# Altium PCB MB1367.PcbDoc (part 4 of 6)
Units mm, origin at the board's own origin, x right, y up, seen from the top; angles counter-clockwise.
Board outline 70 x 82.5 mm, 4 copper layers (Top Layer, Signal Layer 1, Signal Layer 2, Bottom Layer), stack 1.614 mm thick; 187 components, 143 nets, 802 pads, 920 vias.
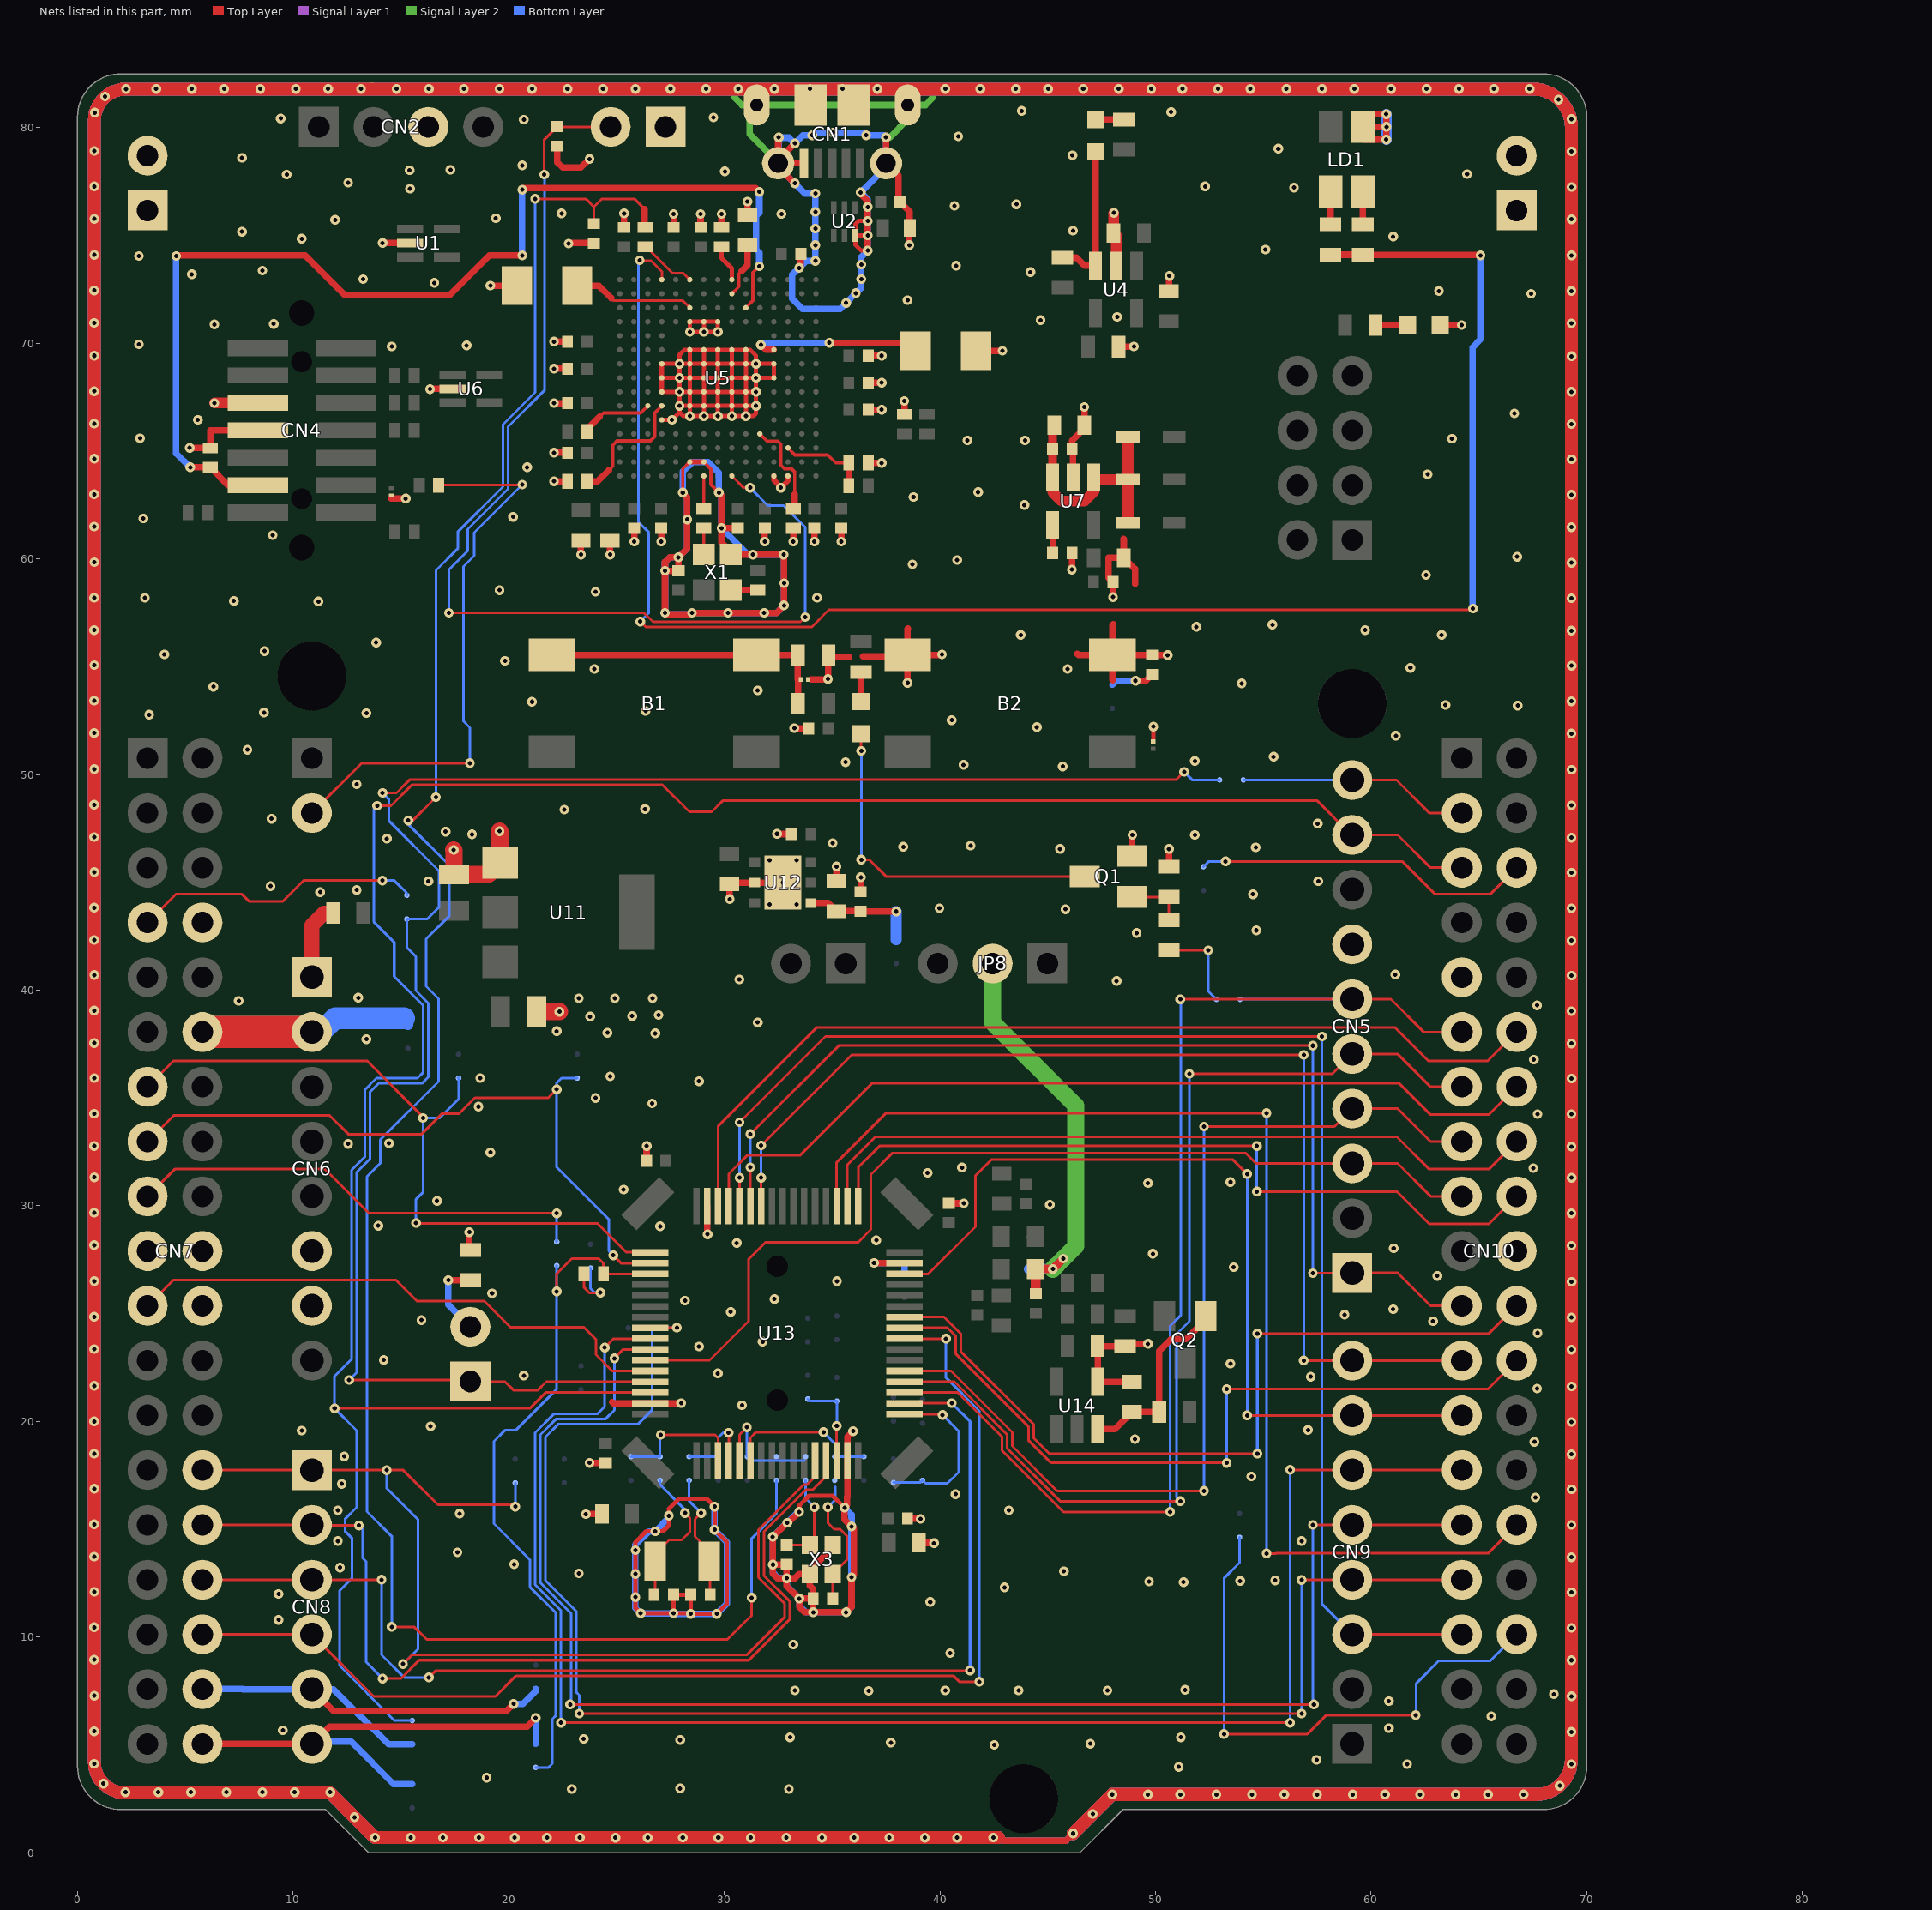
[diagram p5: the nets of this part, all layers, seen from the top]

## Via types
v1: diameter 0.45, hole 0.2, Top Layer to Bottom Layer, tented both sides, 920 vias

## Nets (pads, with @x,y where several pads share a name; then routed paths per layer and width w, separated by ;. In a path a pad name is that pad's centre, name@x,y a point inside that pad or via, vN(x,y) a via of type N, cw(c..) or ccw(c..) an arc to the next point about the centre after c; other vN are vias at no path point) (continued)
GND: B2.3 B2.4 C1.1 C2.1 C3.1 C4.1 C5.1 C6.1 C7.1 C8.1 C9.1 C10.1 C11.1 C12.1 C13.1 C14.1 C15.1 C16.1 C17.1 C18.1 C19.1 C20.1 C21.1 C22.1 C23.1 C24.1 C25.1 C26.1 C27.1 C28.1 C29.1 C30.1 C31.1 C32.1 C33.1 C34.1 C35.1 C36.1 C37.1 C38.1 C39.1 C40.1 C41.1 C42.1 C45.1 C52.1 C53.1 C54.1 C55.1 C56.1 C57.2 C58.2 C59.1 CN1.5 CN1.6 CN1.7 CN1.8 CN1.9 CN1.10 CN1.11 CN2.3 CN4.5 CN4.7 CN5.7 CN6.6 CN6.7 CN7.8 CN7.19 CN7.20 CN7.22 CN10.9 CN10.20 CN11.1 CN11.2 CN12.1 CN12.2 JP1.1 LD1.1 LD3.2 Q1.2 R5.1 R8.2 R11.1 R15.1 R16.2 R17.1 R21.1 R26.1 R28.1 R31.1 SB11.1 U1.2 U2.3 U3.2 U4.2 U5.D5 U5.D7 U5.D8 U5.D9 U5.F2 U5.F6 U5.F7 U5.F8 U5.F9 U5.F10 U5.F12 U5.G2 U5.G6 U5.G7 U5.G8 U5.G9 U5.G10 U5.G12 U5.H6 U5.H7 U5.H8 U5.H9 U5.H10 U5.H12 U5.J6 U5.J7 U5.J8 U5.J9 U5.J10 U5.K6 U5.K7 U5.K8 U5.K9 U5.K10 U5.M1 U5.M8 U5.M9 U5.N1 U6.2 U7.2 U8.2 U9.2 U10.2 U11.1 U12.2 U12.EP U13.15 U13.31 U13.47 U13.63 X1.2 X3.2 X3.4 | length 1507.3
  Top Layer w0.15: v1(28.075,63.075) 28.075,64.175 U5.F2@28.4,64.5 ; U5.G2@29.05,64.5 29.38,64.17 29.38,63.445 v1(29.75,63.075)
  Top Layer w0.2: U5.D5@27.1,66.45 v1(27.575,66.45) 27.925,66.8 ; v1(33.475,15.8) 33.5,15.825 33.5,16.125 33.93,16.555 35.02,16.555 v1(35.575,16) ; v1(36.65,74.3) 36.35,74.3 36.075,74.575 U2.3@36.075,75 ; v1@36.65,74.975 36.625,75 U2.3@36.075,75 ; v1(36.65,75.675) 36.225,75.675 36.075,75.525 U2.3@36.075,75 ; 49.895,51.677 49.895,52.22 v1(49.9,52.225) ; U5.D8@27.1,68.4 U5.D9@27.1,69.05 v1(27.925,69.05) ; U5.D8@27.1,68.4 U5.D7@27.1,67.75 v1(27.925,67.75) ; U5.D8@27.1,68.4 v1(27.925,68.4) ; v1(27.645,11.1) 28.42,11.1 v1(28.445,11.075) ; v1(27.645,11.1) C57.2@27.645,11.965 C58.2@28.445,11.965 v1(28.445,11.075) ; v1(27.645,11.1) v1(26.125,11.1) 25.875,11.35 v1(25.875,11.85) v1(25.875,12.925) v1(25.875,14.025) 25.875,14.399 26.376,14.9 v1(26.8,14.9) 27.15,14.9 27.425,15.175 v1(27.425,15.625) 27.425,15.949 27.891,16.415 29.185,16.415 v1(29.55,16.05) v1(29.55,14.975) 30.105,14.42 30.105,11.53 v1(29.65,11.075) v1(28.445,11.075) ; 27.925,66.8 28.1,66.625 v1(28.4,66.625) ; 27.925,66.8 v1(27.925,67.1) ; v1(27.925,67.1) v1(27.925,67.75) ; v1(27.925,67.1) U5.F6@28.4,67.1 ; v1(27.925,67.75) v1(27.925,68.4) ; v1(27.925,67.75) U5.F7@28.4,67.75 ; v1(27.925,68.4) v1(27.925,69.05) ; v1(27.925,68.4) U5.F8@28.4,68.4 ; v1(27.925,69.05) 27.925,69.475 28.15,69.7 U5.F10@28.4,69.7 ; v1(27.925,69.05) U5.F9@28.4,69.05 ; v1(28.4,66.625) v1(29.05,66.625) ; v1(28.4,66.625) U5.F6@28.4,67.1 ; U5.F6@28.4,67.1 U5.F7@28.4,67.75 ; U5.F6@28.4,67.1 U5.G6@29.05,67.1 ; U5.F7@28.4,67.75 U5.G7@29.05,67.75 ; U5.F7@28.4,67.75 U5.F8@28.4,68.4 ; U5.F8@28.4,68.4 U5.G8@29.05,68.4 ; U5.F8@28.4,68.4 U5.F9@28.4,69.05 ; U5.F9@28.4,69.05 U5.G9@29.05,69.05 ; U5.F9@28.4,69.05 U5.F10@28.4,69.7 ; U5.F10@28.4,69.7 U5.G10@29.05,69.7 ; v1(29.05,66.625) v1(29.7,66.625) ; v1(29.05,66.625) U5.G6@29.05,67.1 ; U5.G6@29.05,67.1 U5.G7@29.05,67.75 ; U5.G6@29.05,67.1 U5.H6@29.7,67.1 ; U5.G7@29.05,67.75 U5.H7@29.7,67.75 ; U5.G7@29.05,67.75 U5.G8@29.05,68.4 ; U5.G8@29.05,68.4 U5.H8@29.7,68.4 ; U5.G8@29.05,68.4 U5.G9@29.05,69.05 ; U5.G9@29.05,69.05 U5.H9@29.7,69.05 ; U5.G9@29.05,69.05 U5.G10@29.05,69.7 ; U5.G10@29.05,69.7 U5.H10@29.7,69.7 ; v1(29.05,70.525) v1(28.4,70.525) U5.F12@28.4,71 U5.G12@29.05,71 ; v1(29.05,70.525) v1(29.7,70.525) U5.H12@29.7,71 U5.G12@29.05,71 ; v1(29.05,70.525) U5.G12@29.05,71 ; v1(29.7,66.625) v1(30.35,66.625) ; v1(29.7,66.625) U5.H6@29.7,67.1 ; U5.H6@29.7,67.1 U5.H7@29.7,67.75 ; U5.H6@29.7,67.1 U5.J6@30.35,67.1 ; U5.H7@29.7,67.75 U5.J7@30.35,67.75 ; U5.H7@29.7,67.75 U5.H8@29.7,68.4 ; U5.H8@29.7,68.4 U5.J8@30.35,68.4 ; U5.H8@29.7,68.4 U5.H9@29.7,69.05 ; U5.H9@29.7,69.05 U5.J9@30.35,69.05 ; U5.H9@29.7,69.05 U5.H10@29.7,69.7 ; U5.H10@29.7,69.7 U5.J10@30.35,69.7 ; v1(30.35,66.625) v1(31,66.625) ; v1(30.35,66.625) U5.J6@30.35,67.1 ; U5.J6@30.35,67.1 U5.K6@31,67.1 ; U5.J6@30.35,67.1 U5.J7@30.35,67.75 ; U5.J7@30.35,67.75 U5.K7@31,67.75 ; U5.J7@30.35,67.75 U5.J8@30.35,68.4 ; U5.J8@30.35,68.4 U5.K8@31,68.4 ; U5.J8@30.35,68.4 U5.J9@30.35,69.05 ; U5.J9@30.35,69.05 U5.K9@31,69.05 ; U5.J9@30.35,69.05 U5.J10@30.35,69.7 ; U5.J10@30.35,69.7 U5.K10@31,69.7 ; v1(31,66.625) 31.35,66.625 31.475,66.75 v1(31.475,67.1) ; v1(31,66.625) U5.K6@31,67.1 ; U5.K6@31,67.1 U5.K7@31,67.75 ; U5.K6@31,67.1 v1(31.475,67.1) ; U5.K7@31,67.75 U5.K8@31,68.4 ; U5.K7@31,67.75 v1(31.475,67.75) ; U5.K8@31,68.4 v1(31.475,68.4) ; U5.K8@31,68.4 U5.K9@31,69.05 ; U5.K9@31,69.05 v1(31.475,69.05) ; U5.K9@31,69.05 U5.K10@31,69.7 ; U5.K10@31,69.7 31.2,69.7 31.475,69.425 v1(31.475,69.05) ; v1(31.475,67.1) v1(31.475,67.75) ; v1(31.475,67.75) v1(31.475,68.4) ; v1(31.475,68.4) v1(31.475,69.05) ; v1(31.475,68.4) U5.M8@32.3,68.4 U5.M9@32.3,69.05 v1(31.475,69.05)
  Top Layer w0.25: U5.F2@28.4,64.5 U5.G2@29.05,64.5 ; U5.M1@32.3,63.85 32.3,63.65 32.625,63.325 v1(32.625,63.3) 32.95,63.625 U5.N1@32.95,63.85
  Top Layer w0.3: v1(5.2,65.15) R15.1@6.15,65.15 6.15,65.965 CN4.7@8.363,65.965 ; v1(6.35,67.225) v1@6.36,67.235 ; 13.64,81.92 13.67,81.89 ; v1(14.15,74.65) U1.2@15.425,74.65 ; 14.545,62.802 15.222,62.802 v1(15.222,62.797) ; v1(16.35,67.875) 16.365,67.89 U6.2@17.395,67.89 ; v1(18.175,28.775) 18.175,27.99 R31.1@18.22,27.945 ; v1(19.15,72.675) C10.1@20.375,72.675 ; v1(22.1,63.6) R17.1@22.725,63.6 ; v1(22.1,64.925) C21.1@22.725,64.925 ; v1(22.1,67.225) C17.1@22.725,67.225 ; v1(22.1,68.825) C15.1@22.725,68.825 ; v1(22.1,70.075) C13.1@22.725,70.075 ; C1.1@22.25,79.15 22.25,78.4 22.5,78.15 23.35,78.15 v1(23.75,78.55) ; v1(22.775,74.625) 22.8,74.65 C3.1@23.95,74.65 ; v1(23.35,60.2) C28.1@23.35,60.85 ; v1(23.575,15.7) C53.1@24.325,15.7 ; v1(23.75,18.075) 23.76,18.065 C52.1@24.495,18.065 ; v1(24.7,60.2) C29.1@24.7,60.85 ; 24.8,20.9 24.86,20.84 27.99,20.84 v1(28,20.85) ; C6.1@25.35,75.375 v1(25.35,76.025) ; v1(25.825,60.8) C22.1@25.825,61.425 ; C42.1@26.395,32.09 26.395,32.77 v1(26.4,32.775) ; v1(27.075,60.8) C23.1@27.075,61.425 ; C7.1@27.65,75.375 v1(27.65,76) ; v1(28.075,63.075) 28.28,62.87 v1(28.28,61.83) 28.28,60.48 v1(27.875,60.075) ; C8.1@28.9,75.375 v1(28.9,76) ; U13.47@29.21,29.99 29.21,28.69 v1(29.225,28.675) ; v1(29.75,63.075) 29.875,62.95 v1(29.875,61.425) ; R5.1@29.875,75.375 v1(29.875,76) ; v1(30.25,44.225) 30.245,44.23 C37.1@30.245,44.915 30.32,44.99 U12.2@31.42,44.99 v1(32.72,44.99) ; C24.1@30.55,61.35 C24.1@30.625,61.425 v1(29.875,61.425) ; C4.1@31.075,75.95 v1(31.075,76.575) ; v1(31.875,60.8) C25.1@31.875,61.425 ; v1(32.45,47.25) 32.46,47.24 C36.1@33.12,47.24 ; v1(32.525,79.55) 32.5,79.525 CN1.7@32.5,78.5 ; v1(32.775,58.875) v1@32.77,58.88 ; v1(33.2,60.8) R21.1@33.2,61.425 ; v1(33.25,52.15) 33.26,52.14 C35.1@33.92,52.14 ; v1(33.275,77.425) 32.5,78.2 CN1.7@32.5,78.35 ; v1(33.275,79.275) CN1.7@32.5,78.5 ; v1(33.475,15.8) 32.975,15.3 v1(32.925,15.3) 32.275,14.65 v1(32.25,14.65) 32.255,14.645 v1(32.255,13.36) ; v1(33.475,73.5) 33.55,73.575 C9.1@33.55,74.15 ; CN1.5@33.7,78.35 CN1.7@32.5,78.35 ; 34.033,54.415 34.79,54.415 v1(34.805,54.43) 34.82,54.43 R26.1@34.82,55.54 34.91,55.45 35.8,55.45 ; v1(34.175,60.8) C26.1@34.175,61.425 ; X3.4@35.02,14.265 35.02,14.133 33.97,13.083 X3.2@33.97,12.915 ; C39.1@35.195,45.065 35.195,45.725 v1(35.205,45.735) ; v1(35.425,60.8) C27.1@35.425,61.425 ; v1@35.875,12.775 36.005,12.905 36.005,15.02 v1(35.9,15.125) 35.575,15.45 v1(35.575,16) 35.7,16.125 35.7,16.5 35.71,16.51 35.71,19.285 v1(35.975,19.55) ; v1(35.9,12.775) 35.9,11.4 v1(35.65,11.15) v1(34.125,11.15) ; C40.1@36.32,44.565 36.32,45.225 v1(36.33,45.235) ; v1(36.325,77) 36.325,76.925 36.65,76.6 v1(36.65,76.325) v1(36.65,75.675) v1(36.65,75) 36.65,74.975 v1(36.65,74.3) ; 36.425,55.475 38.43,55.475 B2.4@38.505,55.55 ; R16.2@36.675,64.45 v1(37.3,64.45) ; C18.1@36.675,66.925 v1(37.3,66.925) ; C16.1@36.675,68.175 v1(37.3,68.175) ; C14.1@36.675,69.425 v1(37.3,69.425) ; v1(36.945,27.35) 36.935,27.34 U13.31@38.36,27.34 ; v1(37.5,79.55) CN1.6@37.5,78.35 38.08,77.77 38.08,76.62 38.1,76.6 38.6,76.1 U3.2@38.6,75.35 ; R11.1@38.35,66.7 v1(38.35,67.325) ; C54.1@38.495,15.49 39.085,15.49 v1(39.1,15.475) ; v1(38.5,54.25) 38.505,54.255 B2.4@38.505,55.55 ; 38.525,56.775 38.505,56.755 B2.4@38.505,55.55 ; v1(38.58,74.555) 38.58,74.855 ; C55.1@39.02,14.365 39.715,14.365 39.725,14.375 v1(39.725,14.35) ; v1(40.1,55.575) 40.075,55.55 B2.4@38.505,55.55 ; C45.1@40.42,30.115 v1(41.115,30.115) ; C12.1@41.675,69.65 v1(42.9,69.65) ; 42.72,0.7 42.82,0.7 42.97,0.55 45.845,0.55 v1(46.185,0.89) ; v1(46.12,59.505) 46.13,59.505 C30.1@46.13,60.275 C30.1@46.18,60.325 ; U7.2@46.18,63.775 46.18,65.025 C20.1@46.13,65.075 46.13,65.48 46.705,66.055 C19.1@46.705,66.2 46.705,67.045 v1(46.7,67.05) ; 46.375,55.6 46.425,55.55 B2.3@48.005,55.55 ; 48.025,54.375 48.005,54.395 B2.3@48.005,55.55 ; v1(48.03,58.23) C33.1@48.03,58.925 47.825,59.13 47.825,60.05 C31.1@48.53,60.05 ; 48.05,56.975 48.005,56.93 B2.3@48.005,55.55 ; C5.1@48.06,75.12 C5.1@48.175,75.005 ; v1@48.06,76.035 v1(48.075,76.05) ; R8.2@48.285,69.845 48.995,69.845 v1(49,69.85) ; 48.525,60.925 48.53,60.92 C31.1@48.53,60.05 ; Q1.2@48.925,46.225 48.925,47.175 48.9,47.2 v1(48.925,47.2) ; 49.05,58.85 49.05,59.53 C31.1@48.53,60.05 ; v1(50.565,55.54) C34.1@49.845,55.54 49.835,55.55 B2.3@48.005,55.55 ; R28.1@50.625,45.725 v1(50.625,46.55) ; C11.1@50.635,72.42 50.635,73.135 v1(50.645,73.125) ; LD1.1@59.62,80.04 v1@60.71,80.04 ; LD1.1@59.65,79.45 v1(60.71,79.45) v1@60.71,80.04 ; LD1.1@59.65,80.625 v1(60.71,80.625) v1@60.71,80.04 ; v1(60.715,80.04) v1@60.71,80.04 ; LD3.2@63.2,70.85 v1(64.2,70.85) ; v1(27.25,59.45) C32.1@27.875,59.45 v1(27.875,60.075) ; v1(27.25,59.45) 27.25,59.85 27.475,60.075 v1(27.875,60.075) ; v1(27.25,59.45) 27.25,57.504 v1(27.251,57.503) 27.324,57.43 28.405,57.43 28.475,57.5 v1(28.5,57.5) v1(30.175,57.5) v1(31.85,57.5) 32.425,57.5 v1(32.77,57.845) v1@32.77,58.88 ; v1(29.875,61.425) 29.875,60.775 30.3,60.35 X1.2@30.3,60.2 v1(31.325,60.2) v1(32.75,60.2) 32.77,60.18 v1@32.77,58.88 ; v1(32.255,13.36) 32.255,12.945 32.475,12.725 v1@32.895,12.725 ; v1(32.255,13.36) 32.26,13.365 C56.1@32.895,13.365 v1@32.895,12.73 ; CN1.7@32.5,78.35 CN1.7@32.5,78.5 ; v1@32.895,12.725 v1@32.895,12.73 ; v1@32.895,12.725 32.895,12.37 v1(33.48,11.785) ; v1@32.895,12.725 v1(32.9,12.725) ; v1@32.895,12.73 v1(32.9,12.725) ; v1(32.9,12.725) 33.275,12.725 33.465,12.915 X3.2@33.97,12.915 ; v1(33.48,11.785) 33.48,11.395 33.725,11.15 v1(34.125,11.15) ; v1(33.48,11.785) 33.485,11.79 C59.1@34.12,11.79 ; X3.2@33.97,12.915 33.97,12.38 34.1,12.25 34.1,11.81 C59.1@34.12,11.79 ; C59.1@34.12,11.79 34.12,11.155 v1(34.125,11.15)
  Top Layer w0.5: v1@6.36,67.235 CN4.5@8.363,67.235 ; C5.1@48.06,75.12 v1@48.06,76.035 ; U4.2@48.175,73.595 C5.1@48.175,75.005
  Top Layer w0.6: 42.72,0.7 13.79,0.7 v1(12.85,1.64) 11.713,2.777 2.22,2.777 cw(c2.22,4.22) 0.777,4.22 v1(0.777,78.925) 0.777,80.315 cw(c2.252,80.315) v1(2.252,81.79) 13.67,81.79 67.502,81.79 cw(c67.502,79.997) 69.295,79.997 69.295,4.34 cw(c67.655,4.34) 67.655,2.7 47.995,2.7 v1(47.09,1.795) v1(46.185,0.89)
  Top Layer w0.8: v1(17.45,46.5) 17.47,46.48 C38.1@17.47,45.365 19.045,45.365 U11.1@19.595,45.915 19.595,47.355 v1(19.575,47.375) ; C41.1@21.295,39.015 22.335,39.015 v1(22.35,39)
  Signal Layer 1 w0.3: 13.64,81.92 13.67,81.89 ; 42.72,0.7 42.82,0.7 42.97,0.55 45.845,0.55 v1(46.185,0.89)
  Signal Layer 1 w0.6: 13.67,81.8 13.67,81.79 ; 42.72,0.7 13.79,0.7 v1(12.85,1.64) 11.713,2.777 2.22,2.777 cw(c2.22,4.22) 0.777,4.22 v1(0.777,78.925) 0.777,80.315 cw(c2.252,80.315) v1(2.252,81.79) 13.67,81.79 ; v1(46.185,0.89) v1(47.09,1.795) 47.995,2.7 67.655,2.7 ccw(c67.655,4.34) 69.295,4.34 69.295,79.997 ccw(c67.502,79.997) 67.502,81.79 13.67,81.79
  Signal Layer 2 w0.3: v1(27.251,57.503) v1(27.251,57.503) ; v1(28.5,57.5) v1(30.175,57.5) ; v1@30.475,81.79 30.475,81.4 30.825,81.05 CN1.8@31.5,81.05 ; CN1.7@32.5,78.35 32.5,78.375 31.175,79.7 31.175,80.725 CN1.8@31.5,81.05 ; v1(37.5,79.55) 37.675,79.55 38.5,80.375 CN1.9@38.5,81.05 ; 39.65,81.79 39.65,81.375 39.325,81.05 CN1.9@38.5,81.05 ; 42.72,0.7 42.82,0.7 42.97,0.55 45.845,0.55 v1(46.185,0.89) ; CN1.8@31.5,81.05 CN1.9@38.5,81.05
  Signal Layer 2 w0.6: 42.72,0.7 13.79,0.7 v1(12.85,1.64) 11.713,2.777 2.22,2.777 cw(c2.22,4.22) 0.777,4.22 v1(0.777,78.925) 0.777,80.315 cw(c2.252,80.315) v1(2.252,81.79) 13.67,81.79 30.475,81.79 39.65,81.79 67.502,81.79 cw(c67.502,79.997) 69.295,79.997 69.295,4.34 cw(c67.655,4.34) 67.655,2.7 47.995,2.7 v1(47.09,1.795) v1(46.185,0.89)
  Bottom Layer w0.3: 13.64,81.92 13.67,81.89 ; v1(27.425,15.625) 27.425,15.525 v1(26.8,14.9) 26.5,14.9 25.875,14.275 v1(25.875,14.025) v1(25.875,12.925) v1(25.875,11.85) 25.875,11.35 v1(26.125,11.1) v1(27.645,11.1) 27.67,11.075 v1(28.445,11.075) v1(29.65,11.075) 30.125,11.55 30.125,14.4 v1(29.55,14.975) v1(29.55,16.05) ; v1@28.05,63.075 28.28,62.845 v1(28.28,61.83) 28.28,60.48 v1(27.875,60.075) 27.475,60.075 27.25,59.85 v1(27.25,59.45) 27.251,59.449 v1(27.251,57.503) 27.324,57.43 28.43,57.43 v1(28.5,57.5) v1(30.175,57.5) v1(31.85,57.5) 32.425,57.5 v1(32.77,57.845) 32.775,57.85 v1(32.775,58.875) 32.775,60.175 v1(32.75,60.2) v1(31.325,60.2) 31.1,60.2 v1(29.875,61.425) 29.875,62.95 v1(29.75,63.075) 29.75,64 29.25,64.5 28.525,64.5 28.075,64.05 v1(28.075,63.075) ; v1@32.513,79.538 v1@32.525,79.538 ; v1(32.525,79.55) v1@32.525,79.538 ; v1(33.475,15.8) 33.425,15.8 v1(32.925,15.3) 32.9,15.3 v1(32.25,14.65) 32.255,14.645 v1(32.255,13.36) 32.255,12.995 32.5,12.75 32.875,12.75 v1(32.9,12.725) 32.9,12.365 v1(33.48,11.785) 33.48,11.445 33.775,11.15 v1(34.125,11.15) v1(35.65,11.15) 35.9,11.4 v1(35.9,12.775) v1(35.9,15.125) 35.9,15.675 v1(35.575,16) ; v1(36.945,27.35) 38.25,27.35 38.36,27.24 SB11.1@38.36,26.84 ; 42.72,0.7 42.82,0.7 42.97,0.55 45.845,0.55 v1(46.185,0.89) ; v1@32.525,79.538 33.012,79.538 v1(33.275,79.275) 33.65,79.65 v1(34.075,79.65) 34.2,79.775 v1(35.025,79.775) 36.45,79.775 v1(36.575,79.65) 37.4,79.65 v1(37.5,79.55) CN1.6@37.5,78.35 37.5,78.175 v1(36.325,77) 36.65,76.675 v1(36.65,76.325) v1(36.65,75.675) v1(36.65,75) v1(36.65,74.3) 36.35,74 v1(36.35,73.65) v1(36.35,72.975) 36.35,72.575 v1(36.1,72.325) v1(35.65,71.875) 35.375,71.6 33.625,71.6 33.15,72.075 33.15,73.175 v1(33.475,73.5) 33.8,73.825 v1(34.225,73.825) v1(34.225,74.55) v1(34.225,75.325) v1(34.225,76.1) v1(34.225,76.95) 33.75,76.95 v1(33.275,77.425) 32.5,78.2 CN1.7@32.5,78.35 32.525,78.375 v1@32.525,79.538
  Bottom Layer w0.5: v1(60.71,79.45) v1(60.71,80.625)
  Bottom Layer w0.6: 42.72,0.7 13.79,0.7 v1(12.85,1.64) 11.713,2.777 2.22,2.777 cw(c2.22,4.22) 0.777,4.22 v1(0.777,78.925) 0.777,80.315 cw(c2.252,80.315) v1(2.252,81.79) 13.67,81.79 67.502,81.79 cw(c67.502,79.997) 69.295,79.997 69.295,4.34 cw(c67.655,4.34) 67.655,2.7 47.995,2.7 v1(47.09,1.795) v1(46.185,0.89)
  other v1: 13.8,0.7 15.45,0.698 16.95,0.698 18.625,0.698 20.275,0.696 21.775,0.696 23.3,0.698 24.95,0.696 26.45,0.696 28.075,0.698 29.725,0.696 31.225,0.696 32.875,0.698 34.525,0.696 36.025,0.696 37.65,0.698 39.3,0.696 40.8,0.696 42.475,0.698 48,2.7 49.65,2.698 51.15,2.698 52.825,2.698 54.475,2.696 55.975,2.696 57.5,2.698 59.15,2.696 60.65,2.696 62.275,2.698 63.925,2.696 65.425,2.696 67.075,2.698 2.225,2.802 3.75,2.804 5.25,2.804 6.9,2.802 8.575,2.802 10.075,2.802 11.725,2.8 22.925,2.95 33,2.95 27.95,2.975 68.75,3.1 1.2,3.2 18.975,3.475 51.075,3.975 61.675,4.1 69.296,4.1 0.773,4.125 57.475,4.3 42.525,5 46.975,5.05 37.725,5.1 27.95,5.225 23.475,5.275 33.05,5.35 51.175,5.35 69.296,5.6 0.773,5.625 9.525,5.675 60.825,5.775 65.575,6.325 60.825,7.025 69.298,7.25 0.775,7.275 68.475,7.35 36.7,7.5 33.275,7.525 40.25,7.525 43.65,7.525 47.775,7.525 51.375,7.55 69.296,8.925 0.773,8.95 40.475,9.25 33.2,9.65 69.296,10.425 0.773,10.45 9.325,10.8 39.55,11.625 9.325,12 69.298,12.075 0.775,12.1 43,12.3 51.3,12.55 49.7,12.575 53.925,12.6 55.55,12.625 23.25,12.95 45.75,13.05 12.175,13.225 20.25,13.375 69.296,13.7 0.773,13.725 17.625,13.925 12.075,14.45 56.775,14.45 69.296,15.2 0.773,15.225 17.725,15.725 12.075,15.875 43.2,15.875 67.625,16.475 40.725,16.625 69.298,16.85 0.775,16.875 12.25,17.1 54.45,17.45 12.375,18.375 69.296,18.475 0.773,18.5 67.575,19.05 49.05,19.175 10.4,19.575 57.075,19.6 16.375,19.775 69.296,19.975 0.773,20 30.825,20.75 67.7,21.525 69.298,21.625 0.775,21.65 57.2,22.075 20.7,22.125 29.7,22.225 53.475,22.675 14.2,22.85 69.296,23.325 0.773,23.35 28.825,23.475 31.775,23.7 67.725,24.1 62.875,24.65 15.95,24.7 69.296,24.825 0.773,24.85 58.775,24.95 30.3,25.075 61.025,25.2 28.175,25.6 32.325,25.675 19.225,25.94 69.298,26.475 0.775,26.5 35.225,26.5 63.075,26.75 53.625,27.15 49.875,27.775 61.05,28.025 69.296,28.15 0.773,28.175 30.575,28.275 37.05,28.4 27.025,29.05 13.95,29.075 69.296,29.65 0.773,29.675 45.1,30.05 16.675,30.225 25.325,30.75 49.65,31.05 53.475,31.1 69.298,31.3 0.775,31.325 39.425,31.525 67.525,31.75 41.025,31.775 19.15,32.475 69.296,32.75 0.773,32.775 12.55,32.875 14.45,32.9 67.725,34.25 69.296,34.25 0.773,34.275 18.6,34.6 26.65,34.75 24.025,35 28.825,35.775 69.298,35.9 0.775,35.925 18.675,35.925 24.7,36 67.55,36.775 69.296,37.525 0.773,37.55 13.4,37.725 26.8,38 24.575,38.025 22.225,38.1 31.55,38.5 23.775,38.775 25.725,38.8 26.95,38.85 69.296,39.025 0.773,39.05 67.7,39.3 7.475,39.5 23.25,39.625 24.925,39.625 26.675,39.625 13.025,39.65 48.2,40.425 30.7,40.5 69.298,40.675 0.775,40.7 61.125,40.725 69.296,42.3 0.773,42.325 49.125,42.65 54.675,42.775 45.825,43.75 39.975,43.8 69.296,43.8 0.773,43.825 32.1,43.975 33.35,43.975 54.525,44.45 11.25,44.55 12.95,44.65 8.95,44.825 16.275,45.05 57.55,45.05 69.298,45.45 0.775,45.475 32.1,46.025 33.35,46.025 45.575,46.55 54.65,46.625 38.3,46.65 41.425,46.7 35.025,46.825 14.35,47.025 69.296,47.075 0.773,47.1 51.825,47.2 18.3,47.225 17.075,47.35 57.525,47.725 9,47.95 22.575,48.375 26.325,48.4 69.296,48.575 0.773,48.6 12.95,49.55 69.298,50.225 0.775,50.25 45.7,50.375 41.1,50.45 35.625,50.575 51.825,50.625 55.475,50.825 7.875,51.15 61.15,51.8 69.296,51.9 0.773,51.925 44.5,52.2 40.55,52.525 3.325,52.775 13.4,52.85 8.65,52.875 26.35,52.95 66.8,53.2 63.45,53.225 21.075,53.375 69.296,53.4 0.773,53.425 31.55,53.9 6.3,54.075 54,54.225 23.975,54.9 45.925,54.9 61.825,54.95 69.298,55.05 0.775,55.075 19.825,55.275 4.025,55.575 8.675,55.725 13.85,56.125 43.75,56.475 63.275,56.475 69.296,56.675 0.773,56.7 59.725,56.7 51.9,56.85 55.425,56.95 11.175,58.025 7.25,58.05 69.296,58.175 0.773,58.2 3.125,58.2 34.3,58.2 24.025,58.475 19.575,58.55 62.55,59.25 38.725,59.75 69.298,59.825 0.775,59.85 40.8,59.95 66.775,60.1 9.05,61.1 69.296,61.475 0.773,61.5 3.05,61.875 20.2,61.95 43.925,62.5 38.775,62.875 69.296,62.975 0.773,63 41.775,63.1 62.625,63.925 20.85,64.25 69.298,64.625 0.775,64.65 41.275,65.5 43.95,65.5 63.75,65.575 2.9,65.6 69.296,66.25 0.773,66.275 5.575,66.45 66.65,66.75 69.296,67.75 0.773,67.775 69.298,69.4 0.775,69.425 14.575,69.85 18.05,69.9 2.85,69.95 6.35,70.875 9.1,70.9 69.296,70.925 0.773,70.95 44.675,71.075 48.225,71.225 38.5,72 67.425,72.3 63.15,72.425 69.296,72.425 0.773,72.45 16.55,72.8 13.25,72.975 5.3,73.2 44.2,73.3 8.575,73.375 40.75,73.6 2.85,74.05 69.298,74.075 0.775,74.1 55.1,74.35 10.4,74.85 61.025,74.95 7.625,75.175 46.175,75.225 11.95,75.725 69.298,75.75 0.775,75.775 19.4,75.8 32.65,76 22.45,76.025 40.675,76.375 43.55,76.45 15.425,77.175 56.425,77.225 69.298,77.25 0.775,77.275 52.3,77.275 12.55,77.45 9.7,77.825 64.45,77.85 30.025,77.975 15.4,78.025 17.3,78.05 20.625,78.25 7.625,78.6 46.15,78.725 69.3,78.9 55.7,79.025 40.85,79.6 20.7,80.375 69.3,80.4 9.425,80.425 29.5,80.475 0.8,80.7 50.725,80.725 43.8,80.775 68.7,81.3 1.275,81.45 3.65,81.8 5.3,81.798 6.8,81.798 8.475,81.798 10.125,81.796 11.625,81.796 13.15,81.798 14.8,81.796 16.3,81.796 17.925,81.798 19.575,81.796 21.075,81.796 22.725,81.798 24.375,81.796 25.875,81.796 27.5,81.798 29.15,81.796 30.65,81.796 32.325,81.798 33.975,81.796 35.475,81.796 37.1,81.798 40.25,81.796 41.875,81.798 43.525,81.796 45.025,81.796 46.65,81.798 48.3,81.796 49.8,81.796 51.25,81.798 52.9,81.796 54.4,81.796 56.075,81.798 57.725,81.796 59.225,81.796 60.925,81.798 62.575,81.796 64.075,81.796 65.7,81.798 67.35,81.796
GNDDetect: CN4.11 R15.2 U5.K13 | length 51
  Top Layer w0.15: U5.K13@31,71.65 31.33,71.98 31.33,73.28 v1(31.625,73.575)
  Top Layer w0.3: v1(4.575,74.05) 4.6,74.075 10.55,74.075 12.375,72.25 17.275,72.25 19.1,74.075 v1(20.625,74.075) ; v1(5.225,64.25) R15.2@6.15,64.25 6.975,63.425 CN4.11@8.363,63.425 ; v1(20.625,77.125) 20.695,77.195 31.455,77.195 v1(31.625,77.025)
  Bottom Layer w0.3: v1(4.575,74.05) 4.575,64.9 v1(5.225,64.25) ; v1(20.625,74.075) v1(20.625,77.125) ; v1(31.625,73.575) 31.625,74.2 31.475,74.35 31.475,75.9 31.625,76.05 v1(31.625,77.025)
IOREF: CN6.2 CN7.12 SB39.2 | length 20.2
  Top Layer w1.5: CN7.12@5.79,38.06 CN6.2@10.87,38.06
  Signal Layer 2 w1.5: CN7.12@5.79,38.06 CN6.2@10.87,38.06
  Bottom Layer w0.5: 15.15,38.7 15.325,38.525 SB39.2@15.325,38.4
  Bottom Layer w1: CN6.2@10.87,38.06 11.31,38.06 11.95,38.7 15.15,38.7
  Bottom Layer w1.5: CN7.12@5.79,38.06 CN6.2@10.87,38.06
LED_STLK: R2.2 R3.2 U5.D15 | length 83
  Top Layer w0.12: v1@26.075,73.825 26.617,73.825 27.105,73.337 27.105,72.955 U5.D15@27.1,72.95 ; v1(26.1,57.1) 26.115,57.1 26.375,56.84 34.051,56.84 34.851,57.64 64.665,57.64 v1(64.725,57.7) ; R2.2@58.12,74.115 R2.2@58.135,74.1 ; v1(65.075,74.075) 65.075,74.1 65.075,74.125 v1@65.1,74.1
  Top Layer w0.3: R2.2@58.12,74.115 R3.2@59.62,74.115 ; R2.2@58.135,74.1 65.075,74.1 v1@65.1,74.1
  Bottom Layer w0.12: v1(26.075,73.85) 26.02,73.795 26.02,61.707 26.5,61.227 26.5,57.5 v1(26.1,57.1) ; v1@64.7,57.725 v1(64.725,57.7)
  Bottom Layer w0.3: v1@64.7,57.725 64.7,69.8 65.075,70.175 v1(65.075,74.075)
MCO: C3.2 R4.2 SB27.1 | length 103.5
  Top Layer w0.12: v1(14.575,10.475) 15.607,10.475 16.197,9.885 30.146,9.885 31.001,10.741 31.009,10.741 31.275,11.007 v1(31.275,11.825) ; v1(15.346,47.868) 15.543,47.868 v1(16.625,48.95) ; v1(21.225,76.7) 23.575,76.7 23.95,76.325 ; C3.2@23.95,75.55 23.95,76.325 ; 26.3,76.225 25.825,76.7 24.325,76.7 23.95,76.325
  Top Layer w0.3: 26.3,76.225 26.3,75.4 R4.2@26.325,75.375
  Bottom Layer w0.12: v1(14.575,10.475) 14.575,14.675 13.43,15.82 13.43,31.355 14.045,31.97 14.045,33.068 16.745,35.768 16.745,39.6 16.17,40.175 16.17,42.376 17.25,43.456 17.25,45.788 15.346,47.692 v1(15.346,47.868) ; v1(16.625,48.95) 16.625,59.475 17.65,60.5 17.65,61.271 19.73,63.351 19.73,66.23 21.225,67.725 v1(21.225,76.7) ; v1(31.275,11.825) 31.275,14.575 32.42,15.72 SB27.1@32.42,17.265
NetB1_3: B1.3 B1.4 R26.2 R27.1 U9.1 | length 13.7
  Top Layer w0.3: B1.4@21.995,55.55 B1.3@31.495,55.55 33.41,55.55 33.408,55.548 33.408,54.415 33.42,54.402 R27.1@33.42,53.29
NetC1_2: C1.2 JP1.2 U5.J1 | length 52.5
  Top Layer w0.12: v1(17.225,57.5) 17.23,57.505 26.268,57.505 26.693,57.08 33.53,57.08 v1(33.75,57.3) ; v1(21.65,77.825) 21.65,79.45 C1.2@22.25,80.05 ; C1.2@22.25,80.075 22.285,80.04 JP1.2@24.73,80.04 ; U5.J1@30.35,63.85 30.9,63.3 v1(31.2,63.3)
  Bottom Layer w0.12: v1(17.225,57.5) 17.225,59.5 18.1,60.375 18.1,61.382 19.97,63.252 19.97,66.131 21.67,67.831 21.67,77.805 v1(21.65,77.825) ; v1(31.2,63.3) 32.025,62.475 32.75,62.475 33.75,61.475 v1(33.75,57.3)
NetC4_2: C4.2 U5.J14 | length 2.6
  Top Layer w0.15: U5.J14@30.35,72.3 30.68,72.63 30.68,73.23 30.8,73.35
  Top Layer w0.3: 30.8,73.35 31.075,73.625 C4.2@31.075,74.55
NetC10_2: C10.2 U5.F13 | length 5.6
  Top Layer w0.12: 24.75,72.1 24.875,71.975 28.075,71.975 U5.F13@28.4,71.65
  Top Layer w0.3: C10.2@23.175,72.675 24.175,72.675 24.75,72.1
NetC12_2: C12.2 U5.M10 | length 8.1
  Top Layer w0.3: v1(31.7,69.925) 31.925,69.7 U5.M10@32.295,69.7 ; v1(34.875,70.025) 38.5,70.025 C12.2@38.875,69.65
  Bottom Layer w0.3: v1(31.7,69.925) 31.8,70.025 v1(34.875,70.025)
NetC19_2: C19.2 C20.2 D1.2 D2.2 D3.2 U7.1 U7.3 | length 11.7
  Top Layer w0.3: C19.2@45.23,66.125 C19.2@45.305,66.2 ; U7.1@47.13,63.775 47.15,63.755 U7.1@47.23,63.675
  Top Layer w0.4: U7.3@45.23,63.775 C20.2@45.23,65.075 C19.2@45.23,66.125
  Top Layer w0.5: U7.3@45.23,63.775 45.23,63.095 45.65,62.675 46.7,62.675 47.15,63.125 47.15,63.755 U7.1@47.15,63.8 ; U7.1@47.23,63.675 D2.2@48.73,63.675 ; D3.2@48.73,61.675 D2.2@48.73,63.675 ; D1.2@48.73,65.675 D2.2@48.73,63.675
NetC30_2: C30.2 U7.4 | length 1.3
  Top Layer w0.3: C30.2@45.23,60.275 U7.4@45.23,61.575
NetC34_2: C34.2 SB1.1 | length 2
  Top Layer w0.3: v1(49.075,54.35) 49.555,54.35 C34.2@49.845,54.64
  Bottom Layer w0.3: SB1.1@47.995,54.165 48.18,54.35 v1(49.075,54.35)
NetC39_2: C39.2 C40.2 SB5.1 U12.4 | length 5.4
  Top Layer w0.3: U12.4@34.02,44.04 34.82,44.04 C39.2@35.195,43.665 C40.2@36.32,43.665 36.335,43.65 v1(37.975,43.65)
  Bottom Layer w0.5: SB5.1@37.97,42.34 37.97,43.645 v1(37.975,43.65)
NetC47_2: C47.2 JP8.2 L2.1 SB10.1 | length 20.6
  Top Layer w0.4: L2.1@44.445,27.065 v1(45.24,27.065) v1(45.725,27.55)
  Top Layer w0.45: C47.2@44.445,25.915 L2.1@44.445,27.065
  Signal Layer 2 w0.8: JP8.2@42.445,41.235 42.445,38.505 46.3,34.65 46.3,28.125 v1(45.725,27.55) v1(45.24,27.065)
  Bottom Layer w0.5: SB10.1@44.145,27.065 v1(45.24,27.065) v1(45.725,27.55)
NetC51_1: C51.1 Q2.1 R35.1 U14.3 | length 8.9
  Top Layer w0.3: U14.3@47.32,19.64 48.12,19.64 C51.1@48.92,20.44 R35.1@50.17,20.44 50.17,23.27 50.725,23.825 51.425,23.825 52.32,24.72 Q2.1@52.32,24.89
NetC51_2: C51.2 R33.1 R34.2 SB14.2 U14.4 | length 6.7
  Top Layer w0.3: C51.2@48.92,21.84 U14.4@47.32,21.84 R34.2@47.32,23.49 R33.1@48.595,23.49 48.705,23.6 v1(49.65,23.6)
  Bottom Layer w0.3: SB14.2@48.595,23.59 49.64,23.59 v1(49.65,23.6)
NetCN5_10: CN5.10 CN10.3 SB2.1 | length 10.8
  Top Layer w0.12: CN5.10@59.13,49.744 61.181,49.744 62.705,48.22 CN10.3@64.21,48.22
  Bottom Layer w0.12: SB2.1@54.075,49.75 54.085,49.74 59.126,49.74 CN5.10@59.13,49.744
NetCN6_1: CN6.1 R30.1 | length 3.7
  Top Layer w0.12: CN6.1@10.87,40.6 CN6.1@10.885,40.615
  Top Layer w0.7: CN6.1@10.87,40.6 10.87,43.02 11.425,43.575 R30.1@11.85,43.575
NetCN7_7: CN7.7 SB4.2 | length 13.4
  Top Layer w0.12: CN7.7@3.25,43.14 4.56,44.45 7.625,44.45 7.95,44.125 9.525,44.125 10.484,45.084 v1(14.141,45.084)
  Bottom Layer w0.12: v1(14.141,45.084) 14.691,45.084 15.275,44.5 SB4.2@15.275,44.4
NetCN7_17: CN7.17 SB7.2 | length 21.7
  Top Layer w0.12: CN7.17@3.25,30.44 4.51,31.7 11.475,31.7 13.52,29.655 22.22,29.655 v1(22.225,29.65)
  Bottom Layer w0.12: SB7.2@22.225,28.325 v1(22.225,29.65)
NetCN7_36: CN7.36 CN8.5 SB34.1 SB35.2 | length 22.1
  Top Layer w0.3: CN8.5@10.87,7.58 11.875,6.575 19.9,6.575 v1(20.225,6.9)
  Bottom Layer w0.3: CN7.36@5.79,7.58 5.8,7.59 7.67,7.59 7.68,7.58 CN8.5@10.87,7.58 11.87,7.58 14.425,5.025 SB34.1@15.525,5.025 ; v1(20.225,6.9) 20.65,6.9 21.25,7.5 SB35.2@21.25,7.6
NetCN7_38: CN7.38 CN8.6 SB36.2 SB37.1 | length 22.7
  Top Layer w0.3: CN7.38@5.79,5.04 CN8.6@10.87,5.04 11.68,5.85 20.85,5.85 v1(21.25,6.25)
  Bottom Layer w0.3: CN8.6@10.87,5.04 10.97,5.14 12.695,5.14 14.66,3.175 SB36.2@15.525,3.175 ; SB37.1@21.25,5.05 v1(21.25,6.25)
NetCN10_6: CN10.6 SB3.1 | length 15.8
  Top Layer w0.12: v1(53.25,45.975) 61.45,45.975 62.975,44.45 65.52,44.45 CN10.6@66.75,45.68
  Bottom Layer w0.12: SB3.1@52.225,45.725 52.475,45.975 v1(53.25,45.975)
NetCN10_34: CN10.34 SB33.1 | length 25.8
  Top Layer w0.12: v1(53.175,5.5) 57.05,5.5 57.925,6.375 v1(62.075,6.375)
  Bottom Layer w0.12: v1(53.175,5.5) 53.175,12.725 53.9,13.45 SB33.1@53.9,14.625 ; v1(62.075,6.375) 62.1,6.4 62.1,7.85 63.15,8.9 65.53,8.9 CN10.34@66.75,10.12
NetJP3_2: JP3.2 R18.1 | length 26.3
  Top Layer w0.12: JP3.2@10.87,48.22 13.175,50.525 v1(18.2,50.525) ; R18.1@16.75,63.425 20.6,63.425 v1(20.625,63.45)
  Bottom Layer w0.12: v1(18.2,50.525) 18.2,52.175 17.9,52.475 17.9,59.65 18.4,60.15 18.4,61.225 v1(20.625,63.45)
NetJP7_2: JP7.2 R31.2 | length 3.6
  Top Layer w0.3: v1(17.2,26.55) 17.205,26.545 R31.2@18.22,26.545
  Bottom Layer w0.3: v1(17.2,26.55) 17.2,25.41 JP7.2@18.22,24.39
NetLD1_2: LD1.2 R3.1 | length 1.5
  Top Layer w0.3: R3.1@59.62,75.515 LD1.2@59.62,77.04
NetLD1_3: LD1.3 R2.1 | length 1.5
  Top Layer w0.3: R2.1@58.12,75.515 LD1.3@58.12,77.04
NetLD2_1: LD2.1 R25.2 | length 1.4
  Top Layer w0.3: LD2.1@36.345,53.39 R25.2@36.345,54.765
NetLD2_2: LD2.2 Q1.3 | length 16.5
  Top Layer w0.12: LD2.2@36.345,51.89 36.345,51.105 v1(36.35,51.1) ; v1(36.35,46.05) 36.725,46.05 37.5,45.275 Q1.3@46.725,45.275
  Bottom Layer w0.12: v1(36.35,46.05) v1(36.35,51.1)
NetLD3_1: LD3.1 R7.1 | length 1.5
  Top Layer w0.3: R7.1@60.2,70.85 LD3.1@61.7,70.85
NetLD4_1: LD4.1 R1.1 | length 1.3
  Top Layer w0.3: LD4.1@47.233,80.38 R1.1@48.533,80.38
NetLD4_2: LD4.2 R6.1 U4.3 | length 7
  Top Layer w0.3: R6.1@45.685,73.97 46.33,73.97 46.705,73.595 U4.3@47.225,73.595 47.233,73.603 LD4.2@47.233,78.88
NetQ1_1: Q1.1 R28.2 R29.2 | length 2.8
  Top Layer w0.12: Q1.1@48.925,44.325 R28.2@50.625,44.325 R29.2@50.625,43.25
NetR4_1: R4.1 U5.F15 | length 2.7
  Top Layer w0.12: R4.1@26.325,74.475 26.375,74.475 27.595,73.255 28.095,73.255 U5.F15@28.4,72.95
NetR5_2: R5.2 U5.J15 | length 1.7
  Top Layer w0.2: R5.2@29.875,74.45 29.875,73.948 30.35,73.473 U5.J15@30.35,72.95
NetR14_2: R14.2 U5.C6 | length 3.4
  Top Layer w0.15: 24.225,66.6 24.395,66.77 26.12,66.77 U5.C6@26.45,67.1
  Top Layer w0.3: R14.2@23.625,65.9 23.625,66 24.225,66.6
NetR16_1: R16.1 R19.1 U5.N3 | length 4.2
  Top Layer w0.15: U5.N3@32.95,65.15 33.275,64.825 34.8,64.825 35.175,64.45 R16.1@35.775,64.45
  Top Layer w0.3: R19.1@35.775,63.4 R16.1@35.775,64.45
NetR17_2: R17.2 U5.D6 | length 6.1
  Top Layer w0.15: 24.65,64.125 24.83,64.305 24.83,65.283 25.022,65.475 26.578,65.475 26.77,65.667 26.77,66.77 U5.D6@27.1,67.1
  Top Layer w0.3: R17.2@23.625,63.6 24.125,63.6 24.65,64.125
NetR20_1: R20.1 X1.3 | length 1.2
  Top Layer w0.15: X1.3@29.05,60.2 R20.1@29.05,61.425
NetR20_2: R20.2 U5.G1 | length 1.5
  Top Layer w0.15: R20.2@29.05,62.325 U5.G1@29.05,63.85
NetR21_2: R21.2 U5.L4 | length 4.7
  Top Layer w0.15: U5.L4@31.65,65.8 31.98,65.47 32.48,65.47 32.63,65.32 32.63,64.345 32.795,64.18 33.12,64.18 33.27,64.03 33.27,63.005
  Top Layer w0.3: R21.2@33.2,62.325 33.27,62.395 33.27,63.005
NetR24_2: R24.2 X1.1 | length 1.3
  Top Layer w0.3: X1.1@30.3,58.55 R24.2@31.55,58.55
NetR29_1: R29.1 SB6.2 | length 4.3
  Top Layer w0.12: R29.1@50.625,41.85 v1(52.45,41.85)
  Bottom Layer w0.12: v1(52.45,41.85) 52.45,39.95 SB6.2@52.825,39.575
NetR32_1: R32.1 SB9.2 | length 3
  Top Layer w0.12: R32.1@23.495,26.84 23.495,26.205 23.75,25.95 24.225,25.95 v1(24.25,25.975)
  Bottom Layer w0.12: SB9.2@23.795,27.115 23.795,26.155 23.975,25.975 v1(24.25,25.975)
NetSB24_2: SB24.2 SB25.2 U13.6 | length 7.2
  Top Layer w0.12: U13.6@31.21,18.19 31.21,19.235 31.475,19.5 v1(34.6,19.5)
  Bottom Layer w0.12: v1(34.6,19.5) 35.12,18.98 SB25.2@35.12,18.365 SB24.2@36.47,18.365
NetSB26_2: SB26.2 SB27.2 SB28.2 U13.5 | length 5.8
  Top Layer w0.12: U13.5@30.71,18.19 30.71,19.385 v1(31.05,19.725)
  Bottom Layer w0.12: v1(31.05,19.725) 31.05,18.385 SB28.2@31.07,18.365 31.245,18.19 33.71,18.19
NetSB29_2: SB29.2 SB30.2 U13.4 | length 4.1
  Top Layer w0.12: v1(30.2,19.475) 30.21,19.465 U13.4@30.21,18.19
  Bottom Layer w0.12: SB30.2@28.37,18.365 SB29.2@29.72,18.365 29.71,18.375 29.71,19.24 29.945,19.475 v1(30.2,19.475)
NetSB31_2: SB31.2 SB32.2 U13.3 | length 6.1
  Top Layer w0.12: v1(27.05,19.375) 29.575,19.375 29.71,19.24 U13.3@29.71,18.19
  Bottom Layer w0.12: SB32.2@25.67,18.365 SB31.2@27.02,18.365 27.02,19.345 v1(27.05,19.375)
OSC32_IN: C57.1 SB31.1 X2.1 | length 6.9
  Top Layer w0.12: C57.1@26.795,12.015 X2.1@26.795,13.515 26.795,13.845 27.45,14.5 28.025,14.5 28.4,14.875 28.4,15.525 v1(28.175,15.75)
  Top Layer w0.2: C57.1@26.745,11.965 C57.1@26.795,12.015
  Bottom Layer w0.12: SB31.1@27.02,17.265 27.02,17.065 28.175,15.91 v1(28.175,15.75)
OSC32_OUT: C58.1 SB30.1 X2.2 | length 5.9
  Top Layer w0.12: v1(28.925,15.75) 28.64,15.465 28.64,14.66 29.295,14.005 X2.2@29.295,13.515 29.345,13.465 C58.1@29.345,11.965
  Bottom Layer w0.12: SB30.1@28.37,17.265 28.37,16.305 v1(28.925,15.75)
OSC_IN: C56.2 SB26.1 X3.1 | length 4.3
  Top Layer w0.12: C56.2@32.895,14.265 X3.1@33.97,14.265 34.175,14.47 v1(34.175,16.025)
  Bottom Layer w0.12: SB26.1@33.77,17.265 33.77,16.43 v1(34.175,16.025)
OSC_OUT: C59.2 SB25.1 X3.3 | length 6.1
  Top Layer w0.12: v1(34.8,16.025) 34.8,15.3 35.1,15 35.375,15 35.675,14.7 35.675,13.57 X3.3@35.02,12.915 C59.2@35.02,11.79
  Bottom Layer w0.12: v1(34.8,16.025) 35.15,16.375 35.15,16.975
PA0: CN7.28 CN8.1 SB21.2 U13.12 | length 53.8
  Top Layer w0.12: CN7.28@5.79,17.74 CN8.1@10.87,17.74 v1(14.34,17.74) 15.11,17.74 16.72,16.13 20.22,16.13 v1(20.3,16.05) ; v1(15.1,8.75) 15.515,9.165 31.038,9.165 32.805,10.932 32.805,11.548 31.585,12.768 31.585,14.974 33.531,16.92 33.534,16.92 33.689,17.075 33.85,17.075 34.21,17.435 U13.12@34.21,18.19
  Bottom Layer w0.12: v1(14.34,17.74) 14.34,16.899 15.8,15.439 15.8,9.45 v1(15.1,8.75) ; v1(20.3,16.05) SB21.2@20.3,17.15
PA1: CN7.30 CN8.2 U13.13 | length 44.1
  Top Layer w0.12: CN7.30@5.79,15.2 CN8.2@10.87,15.2 10.895,15.175 v1(13.05,15.175) ; v1(14.15,8.075) 14.998,8.075 15.848,8.925 31.137,8.925 33.045,10.833 33.045,11.647 31.845,12.847 31.845,14.895 33.63,16.68 33.633,16.68 33.788,16.835 34.11,16.835 34.71,17.435 U13.13@34.71,18.19
  Bottom Layer w0.12: v1(13.05,15.175) 13.22,15.005 13.22,13.665 13.385,13.5 13.385,8.84 v1(14.15,8.075)
PA2: SB17.2 SB18.1 U13.14 | length 4.1
  Top Layer w0.12: U13.14@35.21,18.19 35.21,19.79 v1(35.215,19.79)
  Bottom Layer w0.12: SB18.1@33.87,21.04 33.97,20.94 SB17.2@35.22,20.94 35.22,19.795 v1(35.215,19.79)
PA3: SB22.1 SB23.2 U13.17 | length 8.1
  Top Layer w0.12: U13.17@38.36,20.34 40.085,20.34 v1(40.125,20.3)
  Bottom Layer w0.12: SB23.2@37.845,17.165 39.095,17.165 SB22.1@39.195,17.265 39.335,17.125 40.35,17.125 40.875,17.65 40.875,19.55 v1(40.125,20.3)
PA4: CN7.32 CN8.3 U13.18 | length 54.6
  Top Layer w0.12: CN7.32@5.79,12.66 CN8.3@10.87,12.66 v1(14.1,12.66) ; v1(16.3,8.125) 16.62,8.445 41.395,8.445 v1(41.4,8.45) ; U13.18@38.36,20.84 40.54,20.84 v1(40.55,20.85)
  Bottom Layer w0.12: v1(14.1,12.66) 14.1,9.177 15.152,8.125 v1(16.3,8.125) ; v1(40.55,20.85) 41.4,20 v1(41.4,8.45)
PA5: CN5.6 CN10.11 SB6.1 U13.19 | length 57.9
  Top Layer w0.12: U13.19@38.36,21.34 40.835,21.34 42.875,19.3 42.875,18.664 45.739,15.8 v1(50.675,15.8) ; v1(51.15,39.575) 51.159,39.584 CN5.6@59.13,39.584 60.916,39.584 62.44,38.06 CN10.11@64.21,38.06
  Bottom Layer w0.12: v1(50.675,15.8) 50.675,24.425 51.17,24.92 51.17,39.555 v1(51.15,39.575) ; SB6.1@53.925,39.575 59.121,39.575 CN5.6@59.13,39.584
PA6: CN5.5 CN10.13 U13.20 | length 49.3
  Top Layer w0.12: U13.20@38.36,21.84 40.674,21.84 43.115,19.399 43.115,18.763 45.578,16.3 v1(51.15,16.3) ; v1(51.575,36.125) 58.211,36.125 CN5.5@59.13,37.044 61.231,37.044 62.755,35.52 CN10.13@64.21,35.52
  Bottom Layer w0.12: v1(51.15,16.3) 50.975,16.475 50.975,24.05 51.57,24.645 51.57,36.12 v1(51.575,36.125)
PA7: CN5.4 CN10.15 U13.21 | length 46.4
  Top Layer w0.12: U13.21@38.36,22.34 40.514,22.34 43.355,19.499 43.355,18.862 45.442,16.775 v1(52.25,16.775) ; v1(52.25,33.675) 58.301,33.675 CN5.4@59.13,34.504 61.241,34.504 62.765,32.98 CN10.15@64.21,32.98
  Bottom Layer w0.12: v1(52.25,16.775) v1(52.25,33.675)
PA8: CN9.8 CN10.23 U13.42 | length 51.2
  Top Layer w0.12: U13.42@31.71,29.99 v1(31.71,31.3) ; v1(31.71,32.8) 35.91,37 v1(56.875,37) ; v1(56.875,22.825) 59.125,22.825 CN9.8@59.13,22.82 CN10.23@64.21,22.82
  Bottom Layer w0.12: v1(31.71,31.3) v1(31.71,32.8) ; v1(56.875,22.825) v1(56.875,37)
PA9: CN5.1 CN10.21 U13.43 | length 49.2
  Top Layer w0.12: U13.43@31.21,29.99 v1(31.21,31.79) ; v1(31.21,33.325) 35.312,37.427 57.248,37.427 57.25,37.425 v1(57.3,37.425) ; v1(57.3,26.875) 59.121,26.875 CN5.1@59.13,26.884 61.241,26.884 62.765,25.36 CN10.21@64.21,25.36
  Bottom Layer w0.12: v1(31.21,31.79) v1(31.21,33.325) ; v1(57.3,26.875) v1(57.3,37.425)
PA10: CN9.3 CN10.33 U13.44 | length 65.9
  Top Layer w0.12: U13.44@30.71,29.99 v1(30.71,31.3) ; v1(30.71,33.875) 34.687,37.852 57.723,37.852 v1(57.725,37.85) ; CN9.3@59.13,10.12 CN10.33@64.21,10.12
  Bottom Layer w0.12: v1(30.71,31.3) v1(30.71,33.875) ; v1(57.725,37.85) 57.725,11.525 CN9.3@59.13,10.12
PA11: CN10.14 U13.45 | length 40.9
  Top Layer w0.12: U13.45@30.21,29.99 30.21,31.485 31.075,32.35 33.525,32.35 36.864,35.689 61.291,35.689 62.755,34.225 65.455,34.225 CN10.14@66.75,35.52
PA12: CN10.12 U13.46 | length 43.8
  Top Layer w0.12: U13.46@29.71,29.99 29.71,33.685 34.3,38.275 61.1,38.275 62.65,36.725 65.415,36.725 CN10.12@66.75,38.06
PA13: CN7.13 SB40.2 U13.49 | length 33.9
  Top Layer w0.12: CN7.13@3.25,35.52 4.455,36.725 13.423,36.725 16.025,34.123 v1(16.025,34.075) ; v1(15.7,29.2) 15.72,29.18 24.12,29.18 25.46,27.84 U13.49@26.56,27.84
  Bottom Layer w0.12: v1(15.7,29.2) 15.7,30.3 16.025,30.625 v1(16.025,34.075) 16.8,34.075 17.675,34.95 SB40.2@17.675,35.925 SB40.2@17.65,35.95
PA14: CN7.15 SB41.2 U13.50 | length 32.7
  Top Layer w0.12: CN7.15@3.25,32.98 4.455,34.185 11.7,34.185 12.56,33.325 15.957,33.325 16.912,34.28 17.707,34.28 18.432,35.005 21.83,35.005 v1(22.225,35.4) ; v1(24.85,27.7) 25.21,27.34 U13.50@26.56,27.34
  Bottom Layer w0.12: SB41.2@23.175,35.925 22.45,35.925 22.225,35.7 v1(22.225,35.4) 22.225,31.785 24.65,29.36 24.65,27.9 v1(24.85,27.7)
PA15: R32.2 SB7.1 SB37.2 U13.51 | length 32.7
  Top Layer w0.12: v1(22.225,26.025) 22.225,26.85 22.925,27.55 24.175,27.55 24.395,27.33 R32.2@24.395,26.84 U13.51@26.56,26.84
  Bottom Layer w0.12: SB37.2@21.25,3.95 21.845,3.95 22.02,4.125 22.02,6.193 22.185,6.358 22.185,11.126 20.98,12.331 20.98,13.592 19.31,15.262 19.31,19.074 19.826,19.59 20.318,19.59 22.225,21.497 v1(22.225,26.025) SB7.1@22.225,27.225
PB0: CN7.34 CN8.4 U13.24 | length 56.2
  Top Layer w0.12: CN7.34@5.79,10.12 CN8.4@10.87,10.12 13.745,7.245 19.381,7.245 20.341,8.205 40.625,8.205 40.905,7.925 v1(41.825,7.925) ; U13.24@38.36,23.84 v1(40.285,23.84)
  Bottom Layer w0.12: v1(40.285,23.84) 40.285,22.027 41.825,20.487 v1(41.825,7.925)
PB1: CN10.24 U13.25 | length 35.8
  Top Layer w0.12: U13.25@38.36,24.34 40.358,24.34 40.725,23.973 40.725,23.147 44.11,19.762 44.11,19.126 45.161,18.075 v1(53.3,18.075) ; v1(53.3,21.5) 65.43,21.5 CN10.24@66.75,22.82
  Bottom Layer w0.12: v1(53.3,18.075) v1(53.3,21.5)
PB2: CN10.22 U13.26 | length 38
  Top Layer w0.12: U13.26@38.36,24.84 40.197,24.84 40.965,24.072 40.965,23.246 44.35,19.861 44.35,19.225 45.075,18.5 v1(54.725,18.5) ; v1(54.725,24.075) 65.465,24.075 CN10.22@66.75,25.36
  Bottom Layer w0.12: v1(54.725,18.5) v1(54.725,24.075)
PB3: CN9.4 CN10.31 SB15.1 U13.56 | length 72.3
  Top Layer w0.12: v1(23.275,6.45) v1(56.775,6.45) ; U13.56@26.56,24.34 27.79,24.34 v1(27.8,24.35) ; v1(56.775,12.65) 56.785,12.66 CN9.4@59.13,12.66 CN10.31@64.21,12.66
  Bottom Layer w0.12: v1(23.275,6.45) 23.275,7.3 23.125,7.45 23.125,11.204 21.7,12.629 21.7,19.275 22.305,19.88 26.005,19.88 26.645,20.52 SB15.1@26.645,24.34 27.79,24.34 v1(27.8,24.35) ; v1(56.775,6.45) v1(56.775,12.65)
PB4: CN9.6 CN10.27 U13.57 | length 76.2
  Top Layer w0.12: v1(22.425,6.025) v1(56.25,6.025) ; v1(24.45,23.425) 24.865,23.84 U13.57@26.56,23.84 ; v1(56.25,17.75) 59.12,17.75 CN9.6@59.13,17.74 CN10.27@64.21,17.74
  Bottom Layer w0.12: v1(22.425,6.025) 22.425,11.225 21.22,12.43 21.22,19.474 22.106,20.36 24.125,20.36 24.45,20.685 v1(24.45,23.425) ; v1(56.25,6.025) v1(56.25,17.75)
PB5: CN9.5 CN10.29 U13.58 | length 71
  Top Layer w0.12: v1(22.85,6.875) v1(57.35,6.875) ; v1(24.9,22.925) 25.315,23.34 U13.58@26.56,23.34 ; v1(57.3,15.2) CN9.5@59.13,15.2 CN10.29@64.21,15.2
  Bottom Layer w0.12: v1(22.85,6.875) 22.885,6.91 22.885,11.104 21.46,12.529 21.46,19.374 22.206,20.12 24.495,20.12 24.9,20.525 v1(24.9,22.925) ; v1(57.3,15.2) 57.3,6.925 v1(57.35,6.875)
PB6: CN5.3 CN10.17 U13.59 | length 45.6
  Top Layer w0.12: U13.59@26.56,22.84 29.315,22.84 31.125,24.65 31.125,27.525 31.9,28.3 36.2,28.3 36.8,28.9 36.8,31.45 37.8,32.45 54.175,32.45 54.661,31.964 CN5.3@59.13,31.964 61.241,31.964 62.765,30.44 CN10.17@64.21,30.44
PB7: CN7.21 U13.60 | length 26
  Top Layer w0.12: CN7.21@3.25,25.36 4.455,26.565 14.76,26.565 15.75,25.575 18.875,25.575 20.09,24.36 23.49,24.36 24.045,23.805 24.045,23.092 24.797,22.34 U13.60@26.56,22.34
PB8: JP7.1 SB2.2 SB4.1 U13.61 | length 86.3
  Top Layer w0.12: v1(12.6,21.925) 18.145,21.925 18.23,21.84 19.825,21.84 20.215,21.45 21.35,21.45 21.74,21.84 U13.61@26.56,21.84 ; v1(14.15,49.15) 14.8,49.15 15.41,49.76 50.96,49.76 v1(51.325,50.125)
  Bottom Layer w0.12: v1(12.6,21.925) 12.95,22.275 12.95,31.554 13.565,32.169 13.565,35.279 13.966,35.68 15.978,35.68 16.265,35.967 16.265,39.402 15.69,39.977 15.69,41.56 15.275,41.975 SB4.1@15.275,43.3 16.225,43.3 16.77,43.845 16.77,45.531 14.435,47.866 14.435,48.865 v1(14.15,49.15) ; v1(51.325,50.125) 51.7,49.75 SB2.2@52.975,49.75
PB9: CN5.9 CN10.5 SB34.2 U13.62 | length 116.9
  Top Layer w0.12: v1(11.925,20.6) 20.975,20.6 21.715,21.34 U13.62@26.56,21.34 ; v1(13.895,48.55) 14.539,48.55 15.509,49.52 27.13,49.52 28.38,48.27 29.418,48.27 29.948,48.8 57.486,48.8 59.082,47.204 CN5.9@59.13,47.204 61.241,47.204 62.765,45.68 CN10.5@64.21,45.68
  Bottom Layer w0.12: v1(13.895,48.55) 13.736,48.391 13.736,43.175 14.69,42.221 14.69,40.637 16.025,39.302 16.025,36.17 15.775,35.92 13.866,35.92 13.325,35.379 13.325,32.268 12.71,31.653 12.71,22.885 11.925,22.1 v1(11.925,20.6) 12.95,19.575 12.95,16.014 12.405,15.469 12.405,14.908 12.74,14.573 12.74,12.74 12.15,12.15 12.15,8.675 14.7,6.125 SB34.2@15.525,6.125
PB10: CN9.7 CN10.25 U13.30 | length 40.9
  Top Layer w0.12: U13.30@38.36,26.84 39.465,26.84 41.65,29.025 41.65,31.4 42.4,32.15 53.575,32.15 v1(54.25,31.475) ; v1(54.25,20.275) 55.55,20.275 55.555,20.28 CN9.7@59.13,20.28 CN10.25@64.21,20.28
  Bottom Layer w0.12: v1(54.25,20.275) v1(54.25,31.475)
PB11: CN10.18 U13.33 | length 36
  Top Layer w0.12: U13.33@36.21,29.99 36.21,31.785 37.2,32.775 v1(54.7,32.775) ; v1(54.7,30.66) 61.2,30.66 62.7,29.16 65.47,29.16 CN10.18@66.75,30.44
  Bottom Layer w0.12: v1(54.7,30.66) v1(54.7,32.775)
PB12: CN10.16 U13.34 | length 34.6
  Top Layer w0.12: U13.34@35.71,29.99 35.71,31.91 37,33.2 61.2,33.2 62.7,31.7 65.47,31.7 CN10.16@66.75,32.98
PB13: CN10.30 U13.35 | length 55.5
  Top Layer w0.12: U13.35@35.21,29.99 35.21,32.01 37.5,34.3 v1(55.15,34.3) ; v1(55.15,13.875) 55.595,13.875 55.6,13.88 65.43,13.88 CN10.30@66.75,15.2
  Bottom Layer w0.12: v1(55.15,13.875) v1(55.15,34.3)